# EAGLE board bbstghs_wlan (EAGLE 5.09)
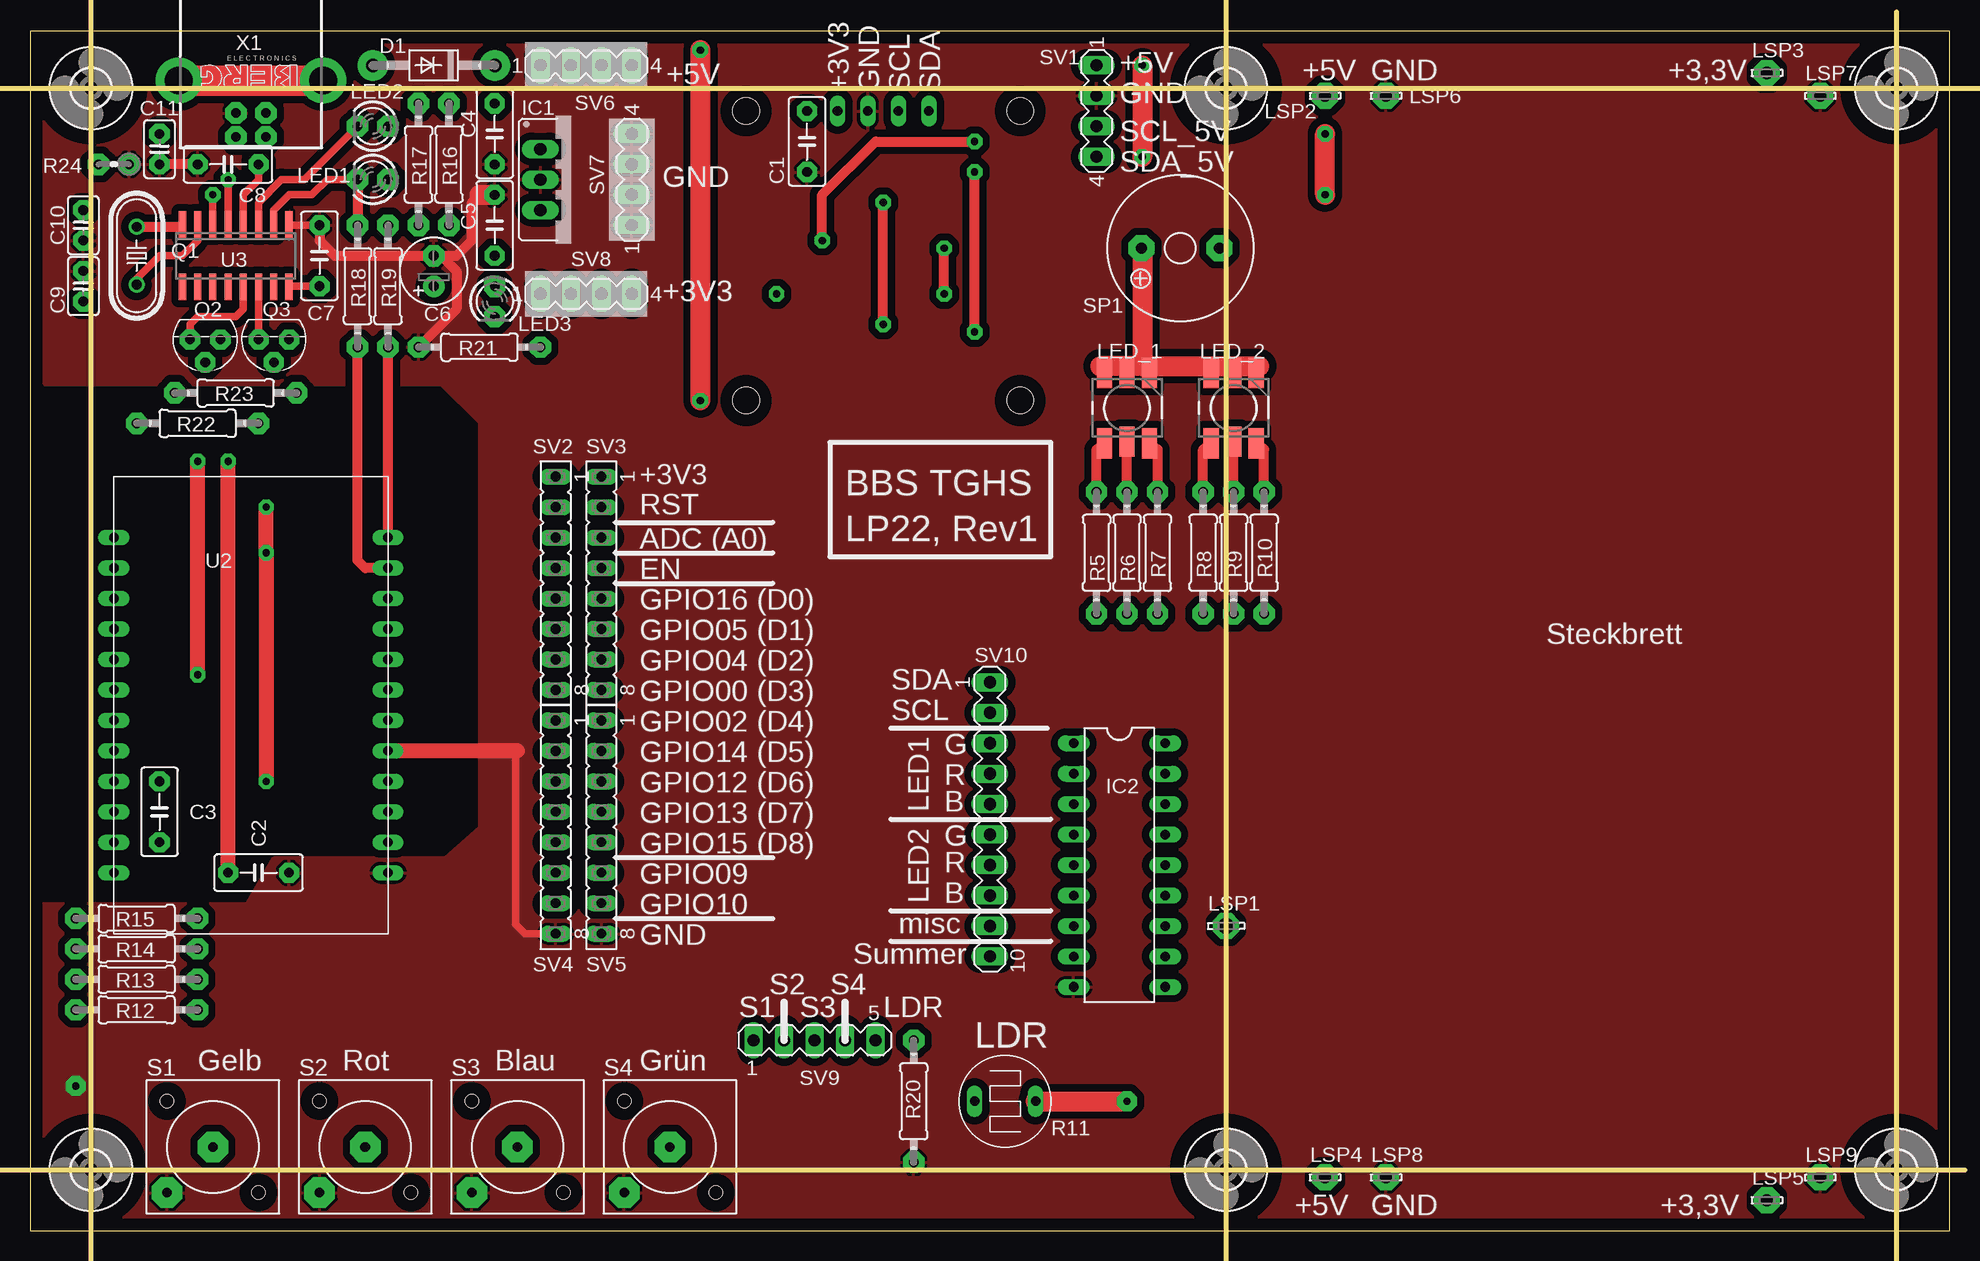
[diagram p0: board, top side]
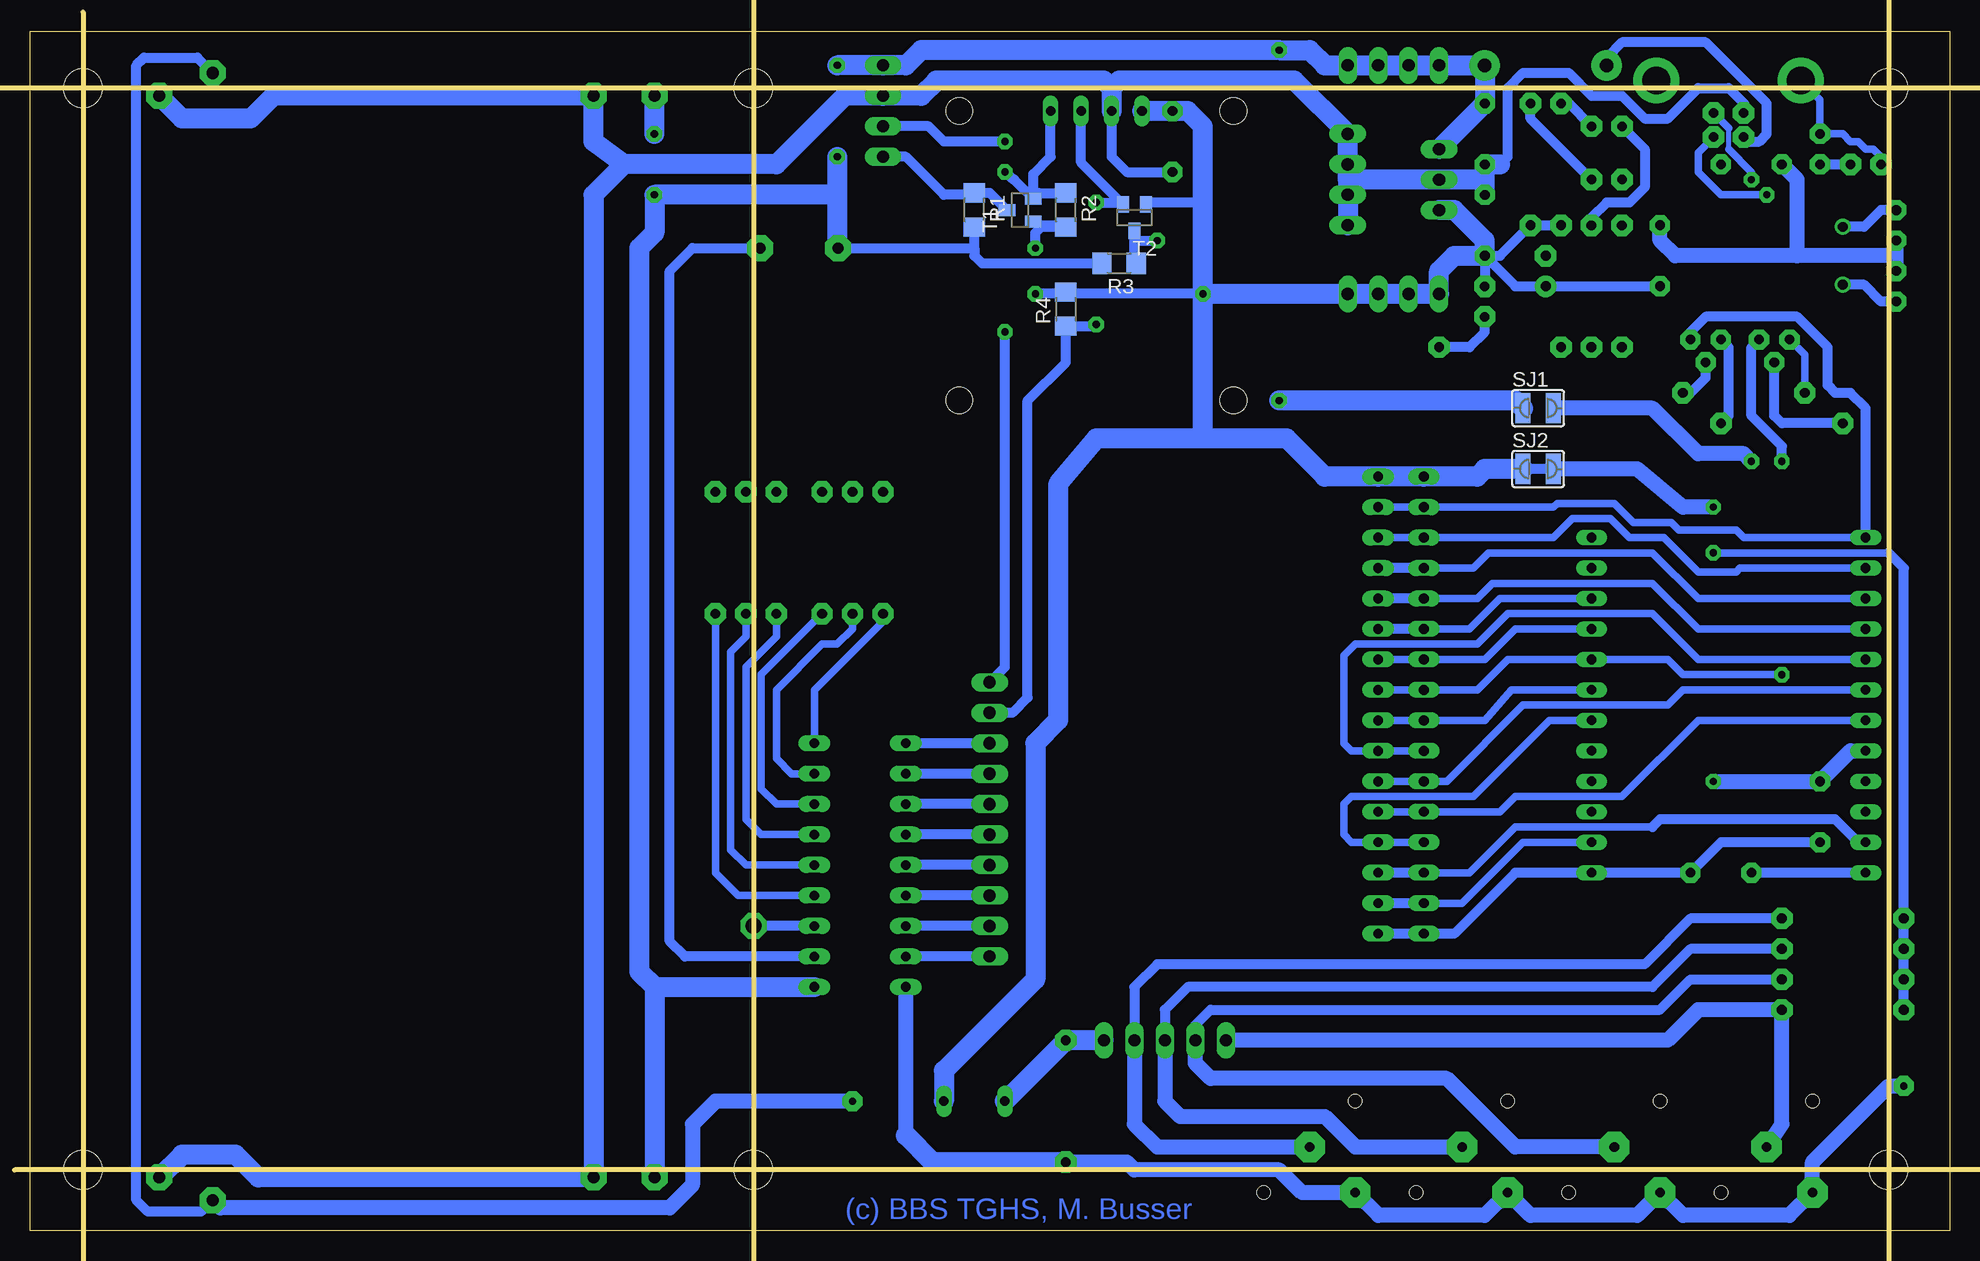
[diagram p1: board, bottom side, seen from below]

Size 160 x 100 mm. Coordinates in mm from the lower left corner, seen from the top.
Outline: 0,0 160,0 160,100 0,100 0,0
Copper layers (1*16): Top 0.035mm / dielectric 1.5mm / Bottom 0.035mm
Design rules "default": minimum track width 10mil, minimum drill 24mil, track to track 8mil, track to pad 8mil, pad to pad 8mil, via to via 8mil, smd to smd 8mil, copper to edge 40mil, drill to drill 8mil, minimum pad ring 10mil, minimum via ring 8mil, stop-mask expansion 4mil, vias tented up to drill 0mil, thermal gap 10mil
Milling: 5 lines

## Footprints (pad centres in the part's own frame; a part is rotated, then mirrored left to right if it is on the bottom)
C050-030X075 = drill 0.813 pad 1.676 octagon: 1 -2.54,0; 2 2.54,0
E2,5-6 = drill 0.813 pad 1.778 round: + -1.27,0 | drill 0.813 pad 1.778 octagon: - 1.27,0
C025-025X050 = drill 0.813 pad 1.676 octagon: 1 -1.27,0; 2 1.27,0
DO41-10 = drill 1.118 pad 2.54 round: A 5.08,0; C -5.08,0
78XXS = drill 1.016 long: GND 0,-2.54; IN -2.54,-2.54; OUT 2.54,-2.54
DIL18 = drill 0.813 long: 1 -10.16,-3.81; 2 -7.62,-3.81; 3 -5.08,-3.81; 4 -2.54,-3.81; 5 0,-3.81; 6 2.54,-3.81; 7 5.08,-3.81; 8 7.62,-3.81; 9 10.16,-3.81; 10 10.16,3.81; 11 7.62,3.81; 12 5.08,3.81; 13 2.54,3.81; 14 0,3.81; 15 -2.54,3.81; 16 -5.08,3.81; 17 -7.62,3.81; 18 -10.16,3.81
LED3MM = drill 0.8 pad 1.778 octagon: A -1.27,0; K 1.27,0
RGBLED = smd 2.54 x 1.27: 1 -2.918,1.881; 2 -2.791,0; 3 -2.918,-1.881; 4 2.946,1.881; 5 2.93,0; 6 2.946,-1.881
LSP13 = drill 1.321 pad 2.159 octagon: MP 0,0
LSP10 = drill 1.016 pad 2.159 octagon: MP 0,0
HC49/S = drill 0.813 round: 1 -2.413,0; 2 2.413,0
TO92 = drill 0.8 pad 1.676 octagon: 1 1.27,0; 2 0,1.905; 3 -1.27,0
R1206 = smd 1.6 x 1.803: 1 -1.422,0; 2 1.422,0
0207/10 = drill 0.813 pad 1.778 octagon: 1 -5.08,0; 2 5.08,0
LDR = drill 0.8 long: P$1 0,2.54; P$2 0,-2.54
0204V = drill 0.813 pad 1.778 octagon: 1 -1.27,0; 2 1.27,0
SCHURTER_MTG = drill 0.8 pad 2.54 octagon: P$1 0,0; P$2 3.81,3.81 | hole 1.1: 0,7.62; 7.62,0
SJW = smd 1.27 x 2.54: 1 -1.27,0; 2 1.27,0
KSS1201 = drill 0.914 pad 2.159 octagon: + 3.251,0; - -3.251,0
MA04-1 = drill 1.016 long: 1 -3.81,0; 2 -1.27,0; 3 1.27,0; 4 3.81,0
FE08 = drill 0.813 long: 1 -8.89,0; 2 -6.35,0; 3 -3.81,0; 4 -1.27,0; 5 1.27,0; 6 3.81,0; 7 6.35,0; 8 8.89,0
MA05-1 = drill 1.016 long: 1 -5.08,0; 2 -2.54,0; 3 0,0; 4 2.54,0; 5 5.08,0
MA10-1 = drill 1.016 long: 1 -11.43,0; 2 -8.89,0; 3 -6.35,0; 4 -3.81,0; 5 -1.27,0; 6 1.27,0; 7 3.81,0; 8 6.35,0; 9 8.89,0; 10 11.43,0
SOT23 = smd 1 x 1.4: 1 -0.95,-1.1; 2 0.95,-1.1; 3 0,1.1
OLED_096 = drill 0.8 long: GND 12.7,26.035; SCL 15.24,26.035; SDA 17.78,26.035; VCC 10.16,26.035 | hole 2.2: 2.54,26.035; 25.4,26.035; 2.54,1.905; 25.4,1.905
ESP-12F_MODUL = drill 0.8 long: 3V3 -12.7,-10.16; 5V -12.7,-20.32; ADC -12.7,5.08; CS -12.7,-12.7; EN -12.7,2.54; GND1 10.16,-20.32; GND2 10.16,-10.16; GPIO00 10.16,-2.54; GPIO02 10.16,-5.08; GPIO04 10.16,0; GPIO05 10.16,2.54; GPIO09 -12.7,-17.78; GPIO10 10.16,-17.78; GPIO12 -12.7,-5.08; GPIO13 -12.7,-7.62; GPIO14 -12.7,-2.54; GPIO15 10.16,-7.62; GPIO16 -12.7,0; MISO -12.7,-15.24; MOSI 10.16,-15.24; RST -12.7,7.62; RXD 10.16,5.08; SCLK 10.16,-12.7; TXD 10.16,7.62
SO16 = smd 0.6 x 2.2: 1 -4.445,-2.6; 2 -3.175,-2.6; 3 -1.905,-2.6; 4 -0.635,-2.6; 5 0.635,-2.6; 6 1.905,-2.6; 7 3.175,-2.6; 8 4.445,-2.6; 9 4.445,2.6; 10 3.175,2.6; 11 1.905,2.6; 12 0.635,2.6; 13 -0.635,2.6; 14 -1.905,2.6; 15 -3.175,2.6; 16 -4.445,2.6
3,2 = hole 3.2: 0,0
PN61729-S = drill 0.8 pad 1.778 octagon: 1 1.25,4.71; 2 -1.25,4.71; 3 -1.25,2.71; 4 1.25,2.71 | drill 2.3 pad 3.81 round: S1 -6.02,0; S2 6.02,0

## Placement (x,y rotation side)
C1  100n  [C050-030X075]  64.77,90.81 90 top
C2  100nF  [C050-030X075]  19.05,29.84 180 top
C3  100nF  [C050-030X075]  10.79,34.92 270 top
C4  100n  [C050-030X075]  38.73,91.44 270 top
C5  100n  [C050-030X075]  38.73,83.82 90 top
C6  10µ  [E2,5-6]  33.66,80.01 90 top
C7  100n  [C050-030X075]  24.13,81.28 90 top
C8  100n  [C050-030X075]  16.51,88.9 180 top
C9  22p  [C025-025X050]  4.45,78.74 270 top
C10  22p  [C025-025X050]  4.45,83.82 90 top
C11  10n  [C025-025X050]  10.79,90.17 90 top
D1  1N581  [DO41-10]  33.66,97.16 180 top
IC1  LV33CV  [78XXS]  45.09,87.63 270 top
IC2  ULN2803A  [DIL18]  90.81,30.48 270 top
LED1  [LED3MM]  28.57,87.63 180 top
LED2  [LED3MM]  28.57,92.08 180 top
LED3  [LED3MM]  38.73,77.47 270 top
LED_1  RGBLED  [RGBLED]  91.44,68.58 90 top
LED_2  RGBLED  [RGBLED]  100.33,68.58 90 top
LSP1  LSP13  [LSP13]  99.69,25.4 0 top
LSP2  LSP10  [LSP10]  107.95,94.61 0 top
LSP3  LSP10  [LSP10]  144.78,96.52 0 top
LSP4  LSP10  [LSP10]  107.95,4.45 0 top
LSP5  LSP10  [LSP10]  144.78,2.54 0 top
LSP6  LSP10  [LSP10]  113.03,94.61 0 top
LSP7  LSP10  [LSP10]  149.22,94.61 0 top
LSP8  LSP10  [LSP10]  113.03,4.45 0 top
LSP9  LSP10  [LSP10]  149.22,4.45 0 top
Q1  12MHz  [HC49/S]  8.89,81.28 270 top
Q2  BC337  [TO92]  14.61,74.3 180 top
Q3  BC337  [TO92]  20.32,74.3 180 top
R1  10k  [R1206]  81.28,85.09 270 bottom
R2  4k7  [R1206]  73.66,85.09 270 bottom
R3  10k  [R1206]  69.22,80.64 180 bottom
R4  4k7  [R1206]  73.66,76.83 90 bottom
R5  470R  [0207/10]  88.9,56.52 90 top
R6  470R  [0207/10]  91.44,56.52 90 top
R7  470R  [0207/10]  93.98,56.52 90 top
R8  470R  [0207/10]  97.79,56.52 90 top
R9  470R  [0207/10]  100.33,56.52 90 top
R10  470R  [0207/10]  102.87,56.52 90 top
R11  LDRLDR  [LDR]  81.28,10.79 270 top
R12  10k  [0207/10]  8.89,18.41 180 top
R13  10k  [0207/10]  8.89,20.95 180 top
R14  10k  [0207/10]  8.89,23.5 180 top
R15  10k  [0207/10]  8.89,26.04 180 top
R16  1k  [0207/10]  34.92,88.9 270 top
R17  1k  [0207/10]  32.38,88.9 270 top
R18  470R  [0207/10]  27.3,78.74 270 top
R19  470R  [0207/10]  29.84,78.74 270 top
R20  470R  [0207/10]  73.66,10.79 90 top
R21  1k  [0207/10]  37.47,73.66 0 top
R22  12k  [0207/10]  13.97,67.31 180 top
R23  12k  [0207/10]  17.14,69.85 0 top
R24  1M  [0204V]  6.99,88.9 180 top
S1  MTG_1241  [SCHURTER_MTG]  11.43,3.17 0 top
S2  MTG_1241  [SCHURTER_MTG]  24.13,3.17 0 top
S3  MTG_1241  [SCHURTER_MTG]  36.83,3.17 0 top
S4  MTG_1241  [SCHURTER_MTG]  49.53,3.17 0 top
SJ1  [SJW]  34.29,68.58 0 bottom
SJ2  [SJW]  34.29,63.5 0 bottom
SP1  AC-1205G  [KSS1201]  95.89,81.92 180 top
SV1  [MA04-1]  88.9,93.34 270 top
SV2  [FE08]  43.81,53.98 270 top
SV3  [FE08]  47.62,53.98 270 top
SV4  [FE08]  43.81,33.66 270 top
SV5  [FE08]  47.62,33.66 270 top
SV6  [MA04-1]  46.35,97.16 0 top
SV7  [MA04-1]  50.16,87.63 90 top
SV8  [MA04-1]  46.35,78.11 0 top
SV9  [MA05-1]  65.41,15.88 0 top
SV10  [MA10-1]  80.01,34.29 270 top
T1  BSS138  [SOT23]  77.47,85.09 90 bottom
T2  BSS138  [SOT23]  67.94,84.45 180 bottom
U1  OLED_096  [OLED_096]  57.15,67.31 0 top
U2  ESP-12F-MODUL  [ESP-12F_MODUL]  19.68,50.16 0 top
U3  CH340G  [SO16]  17.14,81.28 180 top
U$1  [3,2]  5.08,95.25 0 top
U$2  [3,2]  5.08,5.08 0 top
U$3  [3,2]  155.57,5.08 0 top
U$4  [3,2]  155.57,95.25 0 top
U$5  [3,2]  99.69,95.25 0 top
U$6  [3,2]  99.69,5.08 0 top
X1  PN61729-S  [PN61729-S]  18.41,95.89 180 top

## Library data of the parts
C1-C11 D1 LED1-LED3 LED_1 LED_2 Q1-Q3 R1-R24 S1-S4 T1 T2 U1-U3 X1 = bbstghs
IC1 = v-reg-3
IC2 = uln-udn
LSP1-LSP9 = solpad
SJ1 SJ2 = jumper
SP1 = bbstghs; POLLIN: AC-1205G
SV1 SV6-SV10 = con-lstb
SV2-SV5 = con-lsta
U$1-U$6 = holes

## Nets
+3V3: C1.2 C3.1 C5.1 C6.+ C7.1 IC1.OUT LED3.A LSP3.MP LSP5.MP R2.2 R4.2 R11.P$1 R12.2 R13.2 R14.2 R15.2 R16.2 R17.2 SJ2.1 SJ2.2 SV2.1 SV3.1 SV8.1 SV8.2 SV8.3 SV8.4 T1.1 T2.1 U1.VCC U2.3V3 U3.16
+5V: C4.1 D1.C IC1.IN IC2.10 LED_1.4 LED_1.5 LED_1.6 LED_2.4 LED_2.5 LED_2.6 LSP2.MP LSP4.MP R1.2 R3.2 SJ1.1 SP1.+ SV1.1 SV6.1 SV6.2 SV6.3 SV6.4
ADC: SV2.3 SV3.3 U2.ADC
D+: U3.5 X1.3
D-: U3.6 X1.2
DTR: Q2.1 R23.1 U3.13
EN: SV2.4 SV3.4 U2.EN
GND: C1.1 C2.1 C3.2 C4.2 C5.2 C6.- C7.2 C8.2 C9.1 C10.1 C11.1 IC1.GND IC2.9 LSP6.MP LSP7.MP LSP8.MP LSP9.MP R20.1 R21.1 R24.1 S1.P$1 S2.P$1 S3.P$1 S4.P$1 SV1.2 SV4.8 SV5.8 SV7.1 SV7.2 SV7.3 SV7.4 U1.GND U2.GND1 U2.GND2 U3.1 X1.4
GPIO00: Q2.3 SV2.8 SV3.8 U2.GPIO00
GPIO02: SV4.1 SV5.1 U2.GPIO02
GPIO04: SV2.7 SV3.7 U2.GPIO04
GPIO05: SV2.6 SV3.6 U2.GPIO05
GPIO09: SV4.6 SV5.6 U2.GPIO09
GPIO10: SV4.7 SV5.7 U2.GPIO10
GPIO12: SV4.3 SV5.3 U2.GPIO12
GPIO13: SV4.4 SV5.4 U2.GPIO13
GPIO14: SV4.2 SV5.2 U2.GPIO14
GPIO15: SV4.5 SV5.5 U2.GPIO15
GPIO16: SV2.5 SV3.5 U2.GPIO16
N$1: C9.2 Q1.2 U3.7
N$2: C10.2 Q1.1 U3.8
N$3: LED3.K R21.2
N$4: Q3.2 R23.2
N$5: Q2.2 R22.2
N$6: C8.1 U3.4
N$7: LED1.A R16.1
N$8: LED2.A R17.1
N$9: R18.2 U2.RXD
N$10: R19.2 U2.TXD
N$11: C2.2 SJ1.2 U2.5V
N$13: D1.A X1.1
N$14: IC2.18 R5.1
N$15: IC2.17 R6.1
N$16: LED2.K R19.1 U3.3
N$17: C11.2 R24.2 X1.S1 X1.S2
N$18: IC2.16 R7.1
N$19: LED_1.1 R5.2
N$20: LED1.K R18.1 U3.2
N$21: LED_1.2 R6.2
N$22: IC2.15 R8.1
N$23: IC2.14 R9.1
N$24: IC2.13 R10.1
N$25: IC2.1 SV10.3
N$26: IC2.2 SV10.4
N$27: IC2.3 SV10.5
N$28: IC2.4 SV10.6
N$29: IC2.5 SV10.7
N$30: IC2.6 SV10.8
N$31: IC2.7 SV10.9
N$32: IC2.8 SV10.10
N$33: R12.1 S1.P$2 SV9.1
N$34: R13.1 S2.P$2 SV9.2
N$35: R14.1 S3.P$2 SV9.3
N$36: R15.1 S4.P$2 SV9.4
N$37: LED_1.3 R7.2
N$38: LED_2.1 R8.2
N$39: LED_2.2 R9.2
N$40: LED_2.3 R10.2
N$41: IC2.11 SP1.-
N$42: R11.P$2 R20.2 SV9.5
N$43: IC2.12 LSP1.MP
RST: Q3.3 SV2.2 SV3.2 U2.RST
RTS: Q3.1 R22.1 U3.14
SCL: R4.1 SV10.2 T2.2 U1.SCL
SCL_5V: R3.1 SV1.3 T2.3
SDA: R2.1 SV10.1 T1.2 U1.SDA
SDA_5V: R1.1 SV1.4 T1.3

## Tracks (layer width: path | path; a pad name or v marks a point on that pad's centre or on a via)
+3V3  (via drill 0.6 pad 1.27, 0.6 pad 1.68)
  Top 0.61: U3.16 21.65,78.74 C7.1
  Top 0.813: v76.2,78.11 v76.2,81.92
  Top 1.27: v19.68,37.47 v19.68,56.52 19.68,59.69 v19.68,60.33
  Top 1.676: R11.P$1 v91.44,10.79
  Bottom 0.61: 5.08,56.52 v19.68,56.52
  Bottom 0.813: C7.1 C6.+ 36.2,78.74 C5.1 | R17.2 R16.2 37.47,81.28 C5.1 | C5.1 LED3.A | T2.1 66.83,85.72 62.23,85.72 | T1.1 75.9,83.67 R2.2 73.81,83.82 75.56,83.82 76.2,83.19 v76.2,81.92 | v76.2,78.11 74.45,78.11 R4.2 73.18,78.26 73.03,78.11 v62.23,78.11 | R12.2 R13.2 R14.2 R15.2 3.81,55.24 5.08,56.52 | LSP3.MP 146.05,97.79 150.5,97.79 151.13,97.16 151.13,2.54 150.18,1.59 145.73,1.59 LSP5.MP | SJ2.2 SJ2.1
  Bottom 1.27: v19.68,37.47 C3.1 8.26,40.01 U2.3V3 | SJ2.2 26.04,63.5 22.23,60.33 v19.68,60.33 | LSP5.MP 144.15,1.91 106.68,1.91 104.78,3.81 104.78,8.89 102.87,10.79 v91.44,10.79
  Bottom 1.676: IC1.OUT 41.27,85.09 38.73,82.55 C5.1 41.27,81.28 42.55,80.01 SV8.1 SV8.2 SV8.3 SV8.4 v62.23,78.11 | U1.VCC C1.2 63.5,93.34 62.23,92.08 62.23,85.72 v62.23,78.11 | R11.P$1 83.82,13.34 76.2,20.95 76.2,40.64 74.3,42.55 74.3,62.23 71.12,66.04 62.23,66.04 | SJ2.1 38.73,63.5 39.37,62.87 SV2.1 SV3.1 52.07,62.87 55.24,66.04 62.23,66.04 | 62.23,66.04 v62.23,78.11
+5V  (via drill 0.6 pad 1.27)
  Top 0.406: LED_1.4 89.22,71.4 89.22,72.07 | 91.44,72.07 LED_1.5 | LED_1.6 93.66,71.4 93.66,72.07 | 102.55,72.07 102.47,72.07 LED_2.6
  Top 0.61: LED_2.4 98.11,71.4 98.11,72.07 | 100.33,72.07 LED_2.5
  Top 1.676: v92.71,97.16 v92.71,89.53 | v107.95,86.36 v107.95,91.44 | v55.88,69.22 v55.88,98.42 | SP1.+ 92.71,81.84 92.71,72.07 | 89.22,72.07 91.44,72.07 92.71,72.07 | 92.71,72.07 93.66,72.07 98.11,72.07 100.33,72.07 102.47,72.07
  Bottom 0.813: R3.2 80.64,80.64 81.28,81.28 81.28,81.92 | 81.28,81.92 R1.2 | SP1.+ 81.28,81.92
  Bottom 1.676: IC1.IN C4.1 D1.C SV6.1 SV6.2 SV6.3 SV6.4 52.07,97.16 53.34,98.42 v55.88,98.42 85.72,98.42 87,97.16 SV1.1 v92.71,97.16 | SP1.+ 92.71,81.99 92.71,86.36 | v92.71,89.53 92.71,86.36 | v107.95,91.44 LSP2.MP | 92.71,86.36 v107.95,86.36 107.95,83.19 109.22,81.92 109.22,21.59 107.95,20.32 | v55.88,69.22 43.81,69.22 36.2,69.22 SJ1.1 | 107.95,20.32 LSP4.MP | 107.95,20.32 IC2.10
ADC
  Bottom 0.61: U2.ADC 17.46,55.24 17.78,54.93 20.95,54.93 23.81,57.78 26.67,57.78 28.26,59.37 31.43,59.37 33.02,57.78 SV2.3 SV3.3
D+  (via drill 0.6 pad 1.27)
  Top 0.61: U3.5 v16.51,87.63
  Bottom 0.406: 18.41,90.17 18.41,91.92
  Bottom 0.61: 18.41,91.92 X1.3 | 18.41,90.17 16.51,88.27 v16.51,87.63
D-  (via drill 0.6 pad 1.27)
  Top 0.61: U3.6 v15.24,86.36
  Bottom 0.61: X1.2 20.95,89.89 20.95,88.27 19.05,86.36 v15.24,86.36
DTR
  Top 0.61: U3.13 17.78,76.83 17.14,76.2 13.97,76.2 13.34,75.56 Q2.1
  Bottom 0.61: Q2.1 12.06,73.03 R23.1
EN
  Bottom 0.61: U2.EN 20.95,52.7 24.77,56.52 38.42,56.52 39.69,55.24 SV2.4
  Bottom 0.813: SV2.4 SV3.4
GND  (via drill 0.6 pad 1.68)
  Top 0.406: 21.65,83.82 U3.1
  Top 0.61: C7.2 21.65,83.82 | C6.- 34.29,81.28 | 40.64,40.01 40.48,39.85 40.48,25.56 41.27,24.77 SV4.8
  Top 0.813: C8.2 C11.1 | 37.47,86.36 36.83,85.72 36.83,82.55 35.56,81.28 C6.- 25.4,81.28 24.13,82.55 C7.2 | R21.1 35.56,76.83 35.56,80.01 34.29,81.28
  Top 1.27: 40.64,40.01 U2.GND2
  Top 1.676: 37.47,86.36 C5.2
  Bottom 0.406: 17.14,93.19 X1.4
  Bottom 0.813: C11.1 R24.1 | 17.14,93.19 17.14,93.98 18.41,95.25 20.95,95.25 23.5,92.71 25.4,92.71 27.3,94.61 29.84,94.61 31.75,96.52 35.56,96.52 36.83,95.25 36.83,89.53 37.47,88.9 | C1.1 68.58,88.27 69.85,89.53 U1.GND | C3.2 19.05,32.38 C2.1 U2.GND1 36.2,29.84 41.27,24.77 SV4.8 SV5.8
  Bottom 1.27: 12.7,81.28 12.7,87.63 C8.2 | 12.7,81.28 22.86,81.28 24.13,82.55 C7.2 | C9.1 4.45,81.28 | 4.45,81.28 C10.1 | 4.45,81.28 12.7,81.28 | 87,7.94 IC2.9 | v3.81,12.06 5.08,12.06 11.43,5.71 S1.P$1 13.34,1.27 22.23,1.27 S2.P$1 26.04,1.27 34.92,1.27 S3.P$1 38.73,1.27 47.62,1.27 S4.P$1 53.98,3.17 55.88,5.08 67.94,5.08 68.58,5.71 R20.1
  Bottom 1.676: 37.47,88.9 C4.2 38.73,87.63 | C5.2 38.73,87.63 | 38.73,87.63 IC1.GND 50.16,87.63 | 50.16,87.63 SV7.2 SV7.1 | 50.16,87.63 SV7.3 SV7.4 54.61,95.89 69.22,95.89 69.85,95.25 | 69.85,95.25 U1.GND | 69.85,95.25 70.48,95.89 84.45,95.89 85.72,94.61 SV1.2 92.08,94.61 97.79,88.9 110.49,88.9 | 110.49,88.9 113.03,90.81 LSP6.MP 139.7,94.61 141.6,92.71 147.32,92.71 LSP7.MP | 110.49,88.9 113.03,86.36 LSP8.MP 140.97,4.45 142.88,6.35 147.32,6.35 LSP9.MP | 87,7.94 84.77,5.71 R20.1
  pour Top (isolate 0.61): 0,99.69 160.02,99.69 160.02,0 0,0 0,26.67 0.64,27.3 18.1,27.3 20.32,31.11 34.61,31.11 37.47,33.66 37.47,67.31 34.29,70.48 1.27,70.48 0,71.75
GPIO00  (via drill 0.6 pad 1.27)
  Top 1.27: v13.97,46.35 v13.97,64.14
  Bottom 0.61: 16.51,73.66 Q2.3 | v13.97,46.35 22.23,46.35 23.5,47.62 U2.GPIO00 36.83,47.62 39.37,45.09 SV2.8 SV3.8
  Bottom 0.813: 16.51,73.66 16.51,67.94 13.97,65.41 v13.97,64.14
GPIO02
  Bottom 0.61: U2.GPIO02 36.51,45.09 38.73,42.55 SV4.1 SV5.1
GPIO04
  Bottom 0.61: U2.GPIO04 36.2,50.16 38.73,47.62 SV2.7 SV3.7
GPIO05
  Bottom 0.61: U2.GPIO05 37.47,52.7 40.01,50.16 SV2.6
  Bottom 0.813: SV2.6 SV3.6
GPIO09
  Bottom 0.61: SV4.6 40.01,29.84 36.2,33.66 24.77,33.66 | U2.GPIO09 7.62,32.38
  Bottom 0.813: 7.62,32.38 9.53,34.29 24.13,34.29 24.77,33.66 | SV4.6 SV5.6
GPIO10
  Bottom 0.61: U2.GPIO10 35.56,32.38 40.64,27.3 SV4.7
  Bottom 0.813: SV4.7 SV5.7
GPIO12
  Bottom 0.61: U2.GPIO12 22.23,45.09 23.5,43.81 35.56,43.81 41.91,37.47 SV4.3 SV5.3
GPIO13
  Bottom 0.61: U2.GPIO13 20.95,42.55 27.3,36.2 36.2,36.2 37.47,34.92 SV4.4 SV5.4
GPIO14
  Bottom 0.61: U2.GPIO14 20.95,47.62 24.77,51.44 36.83,51.44 39.37,48.9 49.53,48.9 50.48,47.94 50.48,40.64 49.85,40.01 SV5.2 SV4.2
GPIO15
  Bottom 0.61: U2.GPIO15 33.34,42.55 39.69,36.2 49.85,36.2 50.48,35.56 50.48,33.02 49.85,32.38 SV5.5 SV4.5
GPIO16
  Bottom 0.61: U2.GPIO16 20.95,50.16 24.77,53.98 38.1,53.98 39.37,52.7 SV2.5
  Bottom 0.813: SV2.5 SV3.5
N$1
  Top 0.61: U3.7 13.97,82.55 12.7,81.28 10.79,81.28 8.89,79.38 Q1.2
  Bottom 0.813: C9.2 5.71,77.47 7.11,78.87 Q1.2
N$2
  Top 0.406: 12.51,83.69 U3.8
  Top 0.813: Q1.1 12.51,83.69
  Bottom 0.813: C10.2 5.71,85.09 7.11,83.69 Q1.1
N$3
  Bottom 0.813: LED3.K 38.73,74.93 40.01,73.66 R21.2
N$4
  Bottom 0.61: R23.2 21.59,69.85
  Bottom 0.813: Q3.2 20.32,71.12 21.59,69.85
N$5
  Bottom 0.813: Q2.2 14.61,67.94 13.97,67.31 R22.2
N$6
  Top 0.61: U3.4 17.78,86.36 19.05,87.63 C8.1
N$7
  Bottom 0.813: LED1.A 34.92,92.71 R16.1
N$8
  Bottom 0.813: LED2.A 31.75,93.98 R17.1
N$9
  Top 0.813: R18.2 27.3,55.88 27.94,55.24 U2.RXD
N$10
  Top 0.813: U2.TXD R19.2
N$11  (via drill 0.6 pad 1.27)
  Top 1.27: C2.2 v16.51,64.14
  Bottom 0.813: U2.5V C2.2
  Bottom 1.27: v16.51,64.14 17.14,64.77 20.95,64.77 24.77,68.58 SJ1.2
N$13
  Bottom 0.813: X1.1 16.8,90.81 15.88,90.81 15.24,91.44 15.24,93.98 20.32,99.06 27.3,99.06 28.57,97.79 D1.A
N$14
  Bottom 0.61: IC2.18 94.61,45.09 88.9,50.8 R5.1
N$15
  Bottom 0.61: IC2.17 96.52,38.1 97.79,39.37 97.79,45.09 93.98,48.9 92.71,48.9 91.44,50.16 R6.1
N$16
  Top 0.61: U3.3 19.05,85.72 20.95,87.63 22.86,87.63 LED2.K
  Bottom 0.61: 29.84,84.45 R19.1
  Bottom 0.813: 29.84,84.45 28.57,85.72 26.67,85.72 25.4,87 25.4,90.17 LED2.K
N$17
  Top 2.54: X1.S2 X1.S1
  Bottom 0.406: R24.2 5.71,89.53
  Bottom 0.61: X1.S2 10.79,94.28 C11.2 8.89,91.44 8.26,90.81 7.62,90.81 6.99,90.17 6.35,90.17 5.71,89.53
N$18
  Bottom 0.61: IC2.16 97.79,35.56 99.06,36.83 99.06,46.35 R7.1
N$19
  Top 0.813: LED_1.1 88.9,65.13 R5.2
N$20
  Top 0.61: U3.2 20.32,85.09 21.59,86.36 23.5,86.36 24.77,87.63 LED1.K
  Top 0.813: LED1.K R18.1
N$21
  Top 0.813: R6.2 LED_1.2
N$22
  Bottom 0.61: IC2.15 99.06,33.02 100.33,34.29 100.33,46.99 97.79,49.53 R8.1
N$23
  Bottom 0.61: IC2.14 100.33,30.48 101.6,31.75 101.6,48.26 100.33,49.53 R9.1
N$24
  Bottom 0.61: IC2.13 100.97,27.94 102.87,29.84 R10.1
N$25
  Bottom 0.813: SV10.3 IC2.1
N$26
  Bottom 0.813: SV10.4 IC2.2
N$27
  Bottom 0.813: SV10.5 IC2.3
N$28
  Bottom 0.813: SV10.6 IC2.4
N$29
  Bottom 0.813: SV10.7 IC2.5
N$30
  Bottom 0.813: SV10.8 IC2.6
N$31
  Bottom 0.813: SV10.9 IC2.7
N$32
  Bottom 0.813: SV10.10 IC2.8
N$33
  Bottom 1.27: SV9.1 23.5,15.88 20.95,18.41 R12.1 13.97,8.89 S1.P$2
N$34
  Bottom 0.813: R13.1 21.59,20.95 24.13,18.41 61.59,18.41 62.87,17.14 SV9.2
  Bottom 1.27: S2.P$2 36.2,6.99 41.91,12.7 61.59,12.7 62.87,13.97 SV9.2
N$35
  Bottom 0.813: R14.1 21.59,23.5 24.77,20.32 63.5,20.32 65.41,18.41 SV9.3
  Bottom 1.27: S3.P$2 49.53,6.99 52.07,9.53 64.14,9.53 65.41,10.79 SV9.3
N$36
  Bottom 0.813: R15.1 21.59,26.04 25.4,22.23 66.04,22.23 67.94,20.32 SV9.4
  Bottom 1.27: S4.P$2 66.04,6.99 67.94,8.89 SV9.4
N$37
  Top 0.813: LED_1.3 93.98,65.13 R7.2
N$38
  Top 0.813: LED_2.1 97.79,65.13 R8.2
N$39
  Top 0.813: R9.2 LED_2.2
N$40
  Top 0.813: LED_2.3 102.87,65.13 R10.2
N$41
  Bottom 0.813: SP1.- 104.78,81.92 106.68,80.01 106.68,24.13 105.41,22.86 IC2.11
N$42
  Bottom 1.676: SV9.5 R20.2 R11.P$2
N$43
  Bottom 0.813: IC2.12 LSP1.MP
RST
  Bottom 0.61: SV3.2 SV2.2 33.02,60.33 32.7,60.64 27.94,60.64 26.35,59.05 23.18,59.05 22.54,58.42 17.78,58.42 17.14,57.78 U2.RST
  Bottom 0.813: Q3.3 21.59,74.93 20.32,76.2 12.7,76.2 10.16,73.66 10.16,70.48 9.53,69.85 8.26,69.85 6.99,68.58 U2.RST
RTS
  Top 0.61: Q3.1 U3.14
  Bottom 0.813: Q3.1 18.41,73.66 18.41,67.94 R22.1
SCL  (via drill 0.6 pad 1.27)
  Top 0.813: v71.12,75.56 v71.12,85.72
  Bottom 0.813: SV10.2 78.11,43.18 76.83,44.45 76.83,69.22 73.66,72.39 R4.1 71.27,75.41 v71.12,75.56 | U1.SCL 72.39,89.05 T2.2 69.06,85.72 v71.12,85.72
SCL_5V  (via drill 0.6 pad 1.27)
  Top 0.813: v78.74,90.81 70.48,90.81 66.04,86.36 v66.04,82.55
  Bottom 0.813: 67.94,82.55 67.94,80.64 67.79,80.49 R3.1 | 67.94,82.55 T2.3 | SV1.3 85.09,92.08 83.82,90.81 v78.74,90.81 | 67.94,82.55 v66.04,82.55
SDA  (via drill 0.6 pad 1.27)
  Top 0.813: v78.74,74.93 v78.74,88.27
  Bottom 0.406: SV10.1 79.38,46.35
  Bottom 0.813: U1.SDA 74.93,89.53 76.37,88.09 T1.2 | 79.38,46.35 78.74,46.99 v78.74,74.93 | T1.2 75.9,86.51 R2.1 | T1.2 77.96,87.63 v78.74,88.27
SDA_5V
  Bottom 0.813: T1.3 79.99,86.51 R1.1 81.43,86.36 83.82,86.36 87,89.53 SV1.4

## Text on the board
Bottom: (c) BBS TGHS, M. Busser
tPlace: +5V | +5V | GND | SCL_5V | SDA_5V | GND | +3V3 | +3V3 | RST | ADC (A0) | EN | GPIO16 (D0) | GPIO05 (D1) | Steckbrett | GPIO04 (D2) | SDA | GPIO00 (D3) | SCL | GPIO02 (D4) | G | GPIO14 (D5) | GPIO12 (D6) | R | LED1 | B | GPIO13 (D7) | G | GPIO15 (D8) | R | GPIO09 | LED2 | B | GPIO10 | misc | GND | Summer | S2 | S4 | S1 | S3 | LDR | Gelb | Rot | Blau | Grün
tNames: +5V | GND | +3,3V | +3V3 | GND | SCL | SDA | BBS TGHS | LP22, Rev1 | LDR | +5V | GND | +3,3V
Document: +3,3V | +5V | GND | GND | RST | ADC | TxD | RxD | EN | Steckbrett zum | GPIO05 | GOPO16 | aufkleben | GPIO04 | GOPO14 | GPIO00 | GOPO12 | GOPO13 | GPIO02 | GPIO15 | +3V3 | CS | GND | SCLK | MISO | GPIO09 | MOSI | GPIO10 | VIN(+5V) | GND